# Altium PCB PCB_Altium_OpenComs_ABP1_Back-panel_2023-05-12.pcbdoc
Units mm, origin at the board's own origin, x right, y up, seen from the top; angles counter-clockwise.
Board outline 116.08 x 71.63 mm, 2 copper layers (Top Layer, Bottom Layer); 4 components, 6 nets, 10 pads, 4 vias.
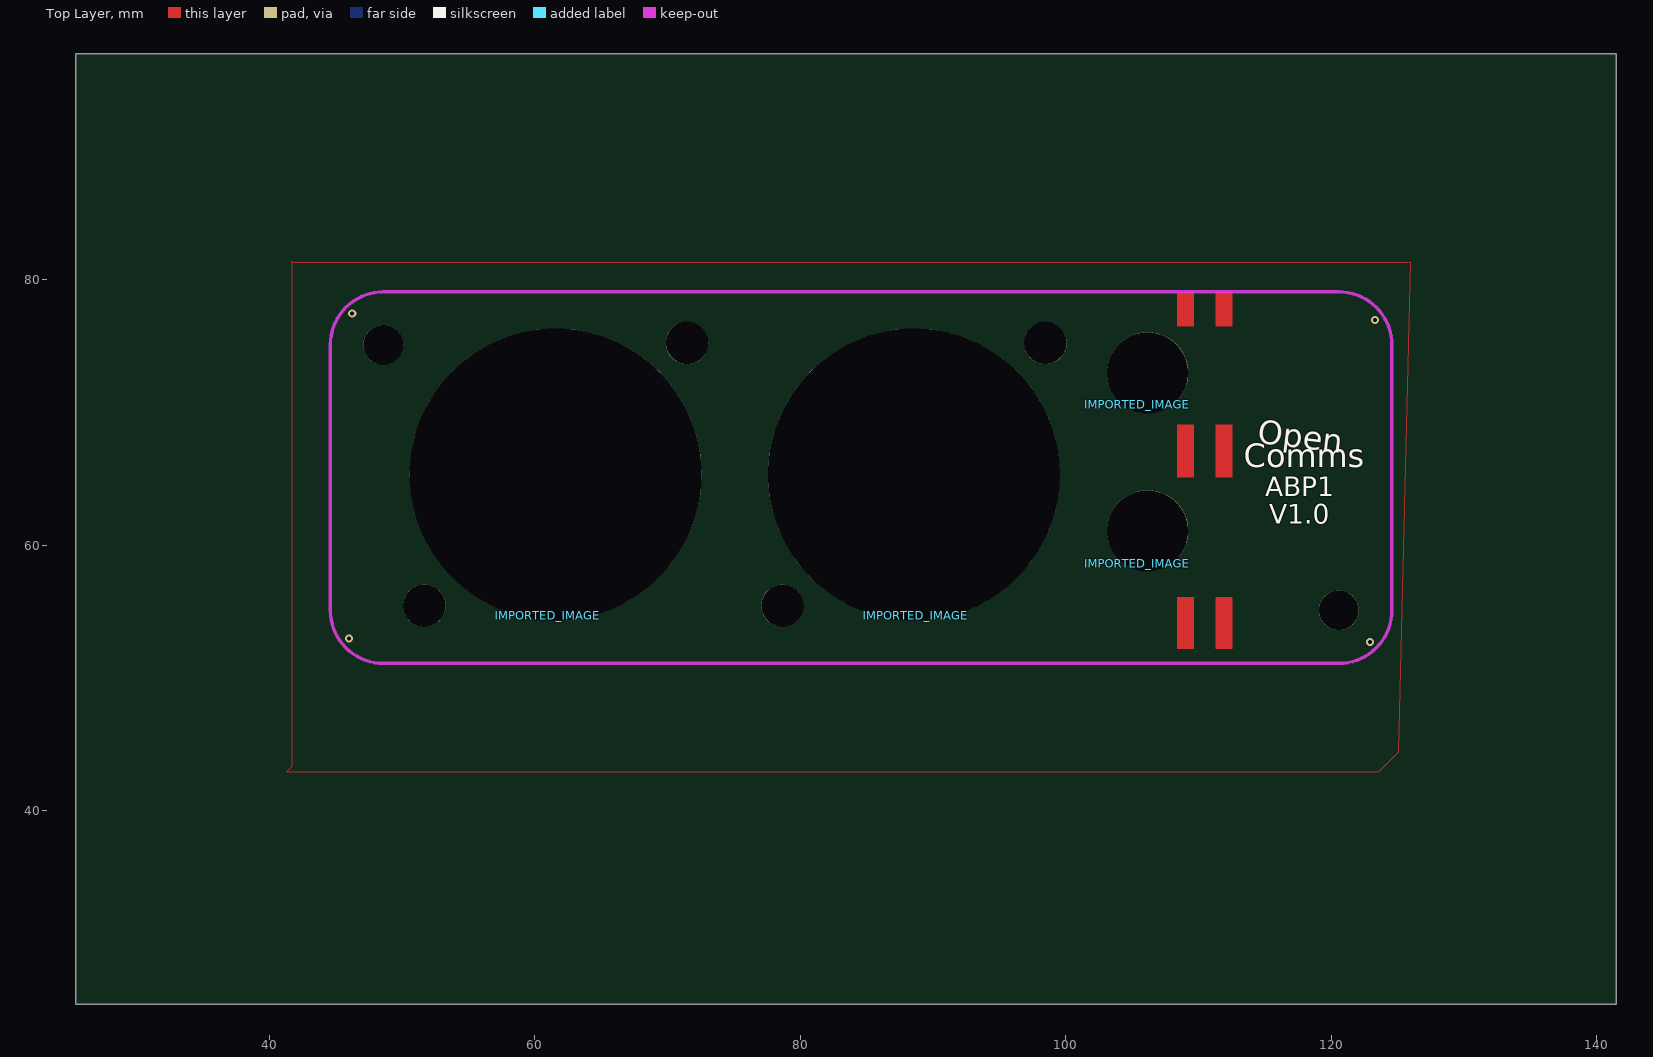
[diagram p0: Top Layer view]
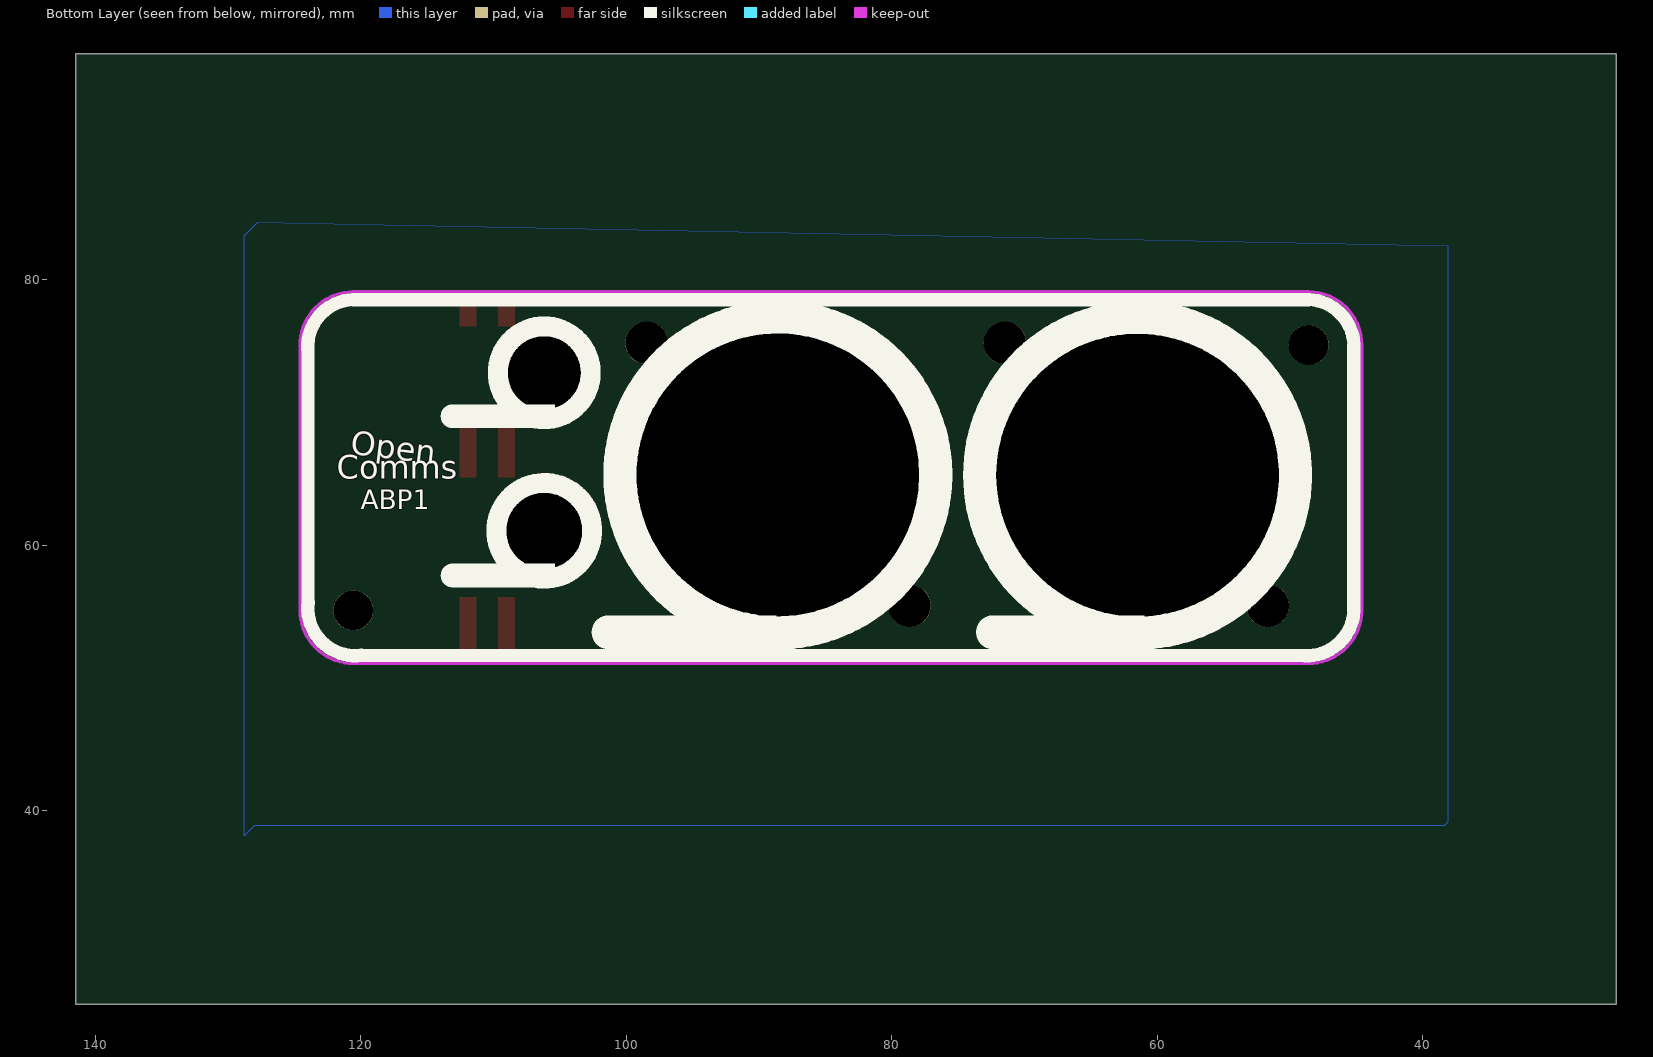
[diagram p1: Bottom Layer view, seen from below]

## Layer stack, top to bottom
Top Layer: signal copper (thickness not stored)
Dielectric: dielectric 0.32, FR-4, Dk 4.8
Bottom Layer: signal copper (thickness not stored)

## Board outline
141.478,25.4 25.4,25.4 25.4,97.028 141.478,97.028

## Components (designator, comment, footprint, x,y, rotation, side; value= is the part's Value field where it differs from the comment)
IMPORTED_IMAGE "IMPORTED_IMAGE" IMPORTED_IMAGE 88.677,54.693 r0 top
IMPORTED_IMAGE "IMPORTED_IMAGE" IMPORTED_IMAGE 60.977,54.693 r0 top
IMPORTED_IMAGE "IMPORTED_IMAGE" IMPORTED_IMAGE 105.377,70.593 r0 top
IMPORTED_IMAGE "IMPORTED_IMAGE" IMPORTED_IMAGE 105.377,58.593 r0 top

## Footprints (in the part's own frame and the unit in brackets; to place one, negate y for a bottom-side part, rotate by r counter-clockwise, add the part's x,y. Pads: shape width x height; smd on the part's side, far side on the other; paste and mask are expansions set on the pad)
IMPORTED_IMAGE [mm]

## Free pads (board coordinates)
  round 3 hole 3 unplated: ""(48.577,75.093) ""(120.577,55.093)
  round 3.2 hole 3.2 unplated: ""(51.659,55.439) ""(71.459,75.239) ""(78.659,55.439) ""(98.459,75.239)
  round 22 hole 22 unplated: ""(61.559,65.339) ""(88.559,65.339)
  round 6.1 hole 6.1 unplated: ""(106.177,61.082) ""(106.177,72.993)

## Via types
v1: diameter 0.61, hole 0.305, Top Layer to Bottom Layer, tented both sides, 4 vias

## Nets (pads, with @x,y where several pads share a name; then routed paths per layer and width w, separated by ;. In a path a pad name is that pad's centre, name@x,y a point inside that pad or via, vN(x,y) a via of type N, cw(c..) or ccw(c..) an arc to the next point about the centre after c; other vN are vias at no path point)
GND: 
  other v1: 122.936,52.705 45.974,52.959 123.317,76.962 46.228,77.47
S$35479: 
S$35549: 
S$44845: 
S$44867: 
S$44889: 

## Polygon pours and split planes (outlines as drawn)
GND on Top Layer (solid): 125.984,81.28 41.783,81.28 41.656,81.407 41.656,43.307 41.275,42.926 123.571,42.926 125.095,44.45
GND on Bottom Layer (solid): 38.1,82.55 38.1,39.116 38.354,38.862 128.016,38.862 128.778,38.1 128.778,83.312 127.762,84.328

## Keep-outs
Keep-Out Layer:
  lines w0.254: 44.577,55.093 ccw(c48.577,55.093) 48.577,51.093 ; 44.577,75.093 cw(c48.577,75.093) 48.577,79.093 ; 120.577,51.093 ccw(c120.577,55.093) 124.577,55.093 ; 120.577,79.093 cw(c120.577,75.093) 124.577,75.093

## Other copper
Top Layer:
  rectangle net GND: 108.367,76.493 109.667,79.093
  rectangle net GND: 108.367,52.193 109.667,56.093
  rectangle net GND: 108.367,65.093 109.667,69.093
  rectangle net GND: 111.277,52.193 112.577,56.093
  rectangle net GND: 111.277,65.093 112.577,69.093
  rectangle net GND: 111.277,76.493 112.577,79.093

## Silkscreen, mask and mechanical layers (free items; w line width, h text height)
Top Overlay:
  text "Open" at 114.308,67.101 h3 r353
  text "Comms" at 113.411,65.278 h3
  text "ABP1" at 115.022,63.208 h2.5
  text "V1.0" at 115.319,61.131 h2.5
Bottom Overlay:
  circle w2.5: c61.468,65.278 r11.9
  circle w2.5: c88.577,65.293 r11.9
  circle w1.5: c106.177,72.993 r3.5
  circle w1.5: c106.177,61.082 r3.611
  lines w1: 45.177,55.093 45.177,75.093 ; 45.177,55.693 ccw(c48.725,55.241) 49.177,51.693 ; 45.177,74.493 cw(c48.725,74.945) 49.177,78.493 ; 48.577,51.693 120.577,51.693 ; 48.577,78.493 120.577,78.493 ; 119.969,51.701 ccw(c120.42,55.25) 123.969,55.701 ; 119.977,78.493 cw(c120.429,74.945) 123.977,74.493 ; 123.977,55.093 123.977,75.093
  text "Open" at 120.904,66.294 h3 r7
  text "Comms" at 121.804,64.394 h3
  text "ABP1" at 120.015,62.23 h2.5
Top Solder:
  rectangle net GND: 111.226,52.142 112.628,56.144
  rectangle net GND: 108.316,52.142 109.718,56.144
  rectangle net GND: 108.316,65.042 109.718,69.144
  rectangle net GND: 111.226,65.042 112.628,69.144
  rectangle net GND: 108.316,76.442 109.718,79.144
  rectangle net GND: 111.226,76.442 112.628,79.144
Document:
  region: 48.659,51.439 48.659,53.039 118.609,53.039 118.609,51.439
  region: 111.277,51.093 109.677,51.093 109.677,79.093 111.277,79.093
  lines w0.254 net S$35479: 49.059,52.839 61.559,52.839 74.359,52.839 74.359,65.339 74.359,78.139 66.705,78.139 61.559,78.139 49.059,78.139 49.059,65.339 49.059,52.839 ; 76.059,52.839 88.559,52.839 101.359,52.839 101.359,65.339 101.359,78.139 93.705,78.139 88.559,78.139 76.059,78.139 76.059,65.339 76.059,52.839
  lines w0.254 net S$35549: 49.059,52.839 61.559,65.339 74.359,78.139 ; 76.059,52.839 88.559,65.339 101.359,78.139
  lines w0.254 net S$44845: 103.677,54.882 108.677,54.882 ; 103.677,66.882 108.677,66.882 ; 103.677,67.082 108.677,67.082 ; 103.677,79.082 108.677,79.082
  lines w0.254 net S$44867: 103.677,54.882 103.677,66.882 ; 103.677,67.082 103.677,79.082
  lines w0.254 net S$44889: 108.677,54.882 108.677,55.282 109.577,55.282 109.577,56.482 108.677,56.482 108.677,65.282 109.577,65.282 109.577,66.482 108.677,66.482 108.677,66.882 ; 108.677,67.082 108.677,67.482 109.577,67.482 109.577,68.682 108.677,68.682 108.677,77.482 109.577,77.482 109.577,78.682 108.677,78.682 108.677,79.082